# EAGLE board fiducialandalignment (EAGLE 8.6.0)

Size 6.35 x 95.25 mm. Coordinates in mm from the lower left corner, seen from the top.
Outline: 0,0 6.35,0 6.35,95.25 0,95.25 0,0
Copper layers (1*16): Top 0.035mm / dielectric 1.5mm / Bottom 0.035mm
Design rules "default": minimum track width 6mil, minimum drill 0.35mm, track to track 6mil, track to pad 6mil, pad to pad 6mil, via to via 6mil, smd to smd 6mil, copper to edge 40mil, drill to drill 6mil, minimum pad ring 10mil, minimum via ring 8mil, stop-mask expansion 4mil, vias tented up to drill 0mil, thermal gap 10mil
Holes 3.17 mm at 3.17,3.17

## Footprints (pad centres in the part's own frame; a part is rotated, then mirrored left to right if it is on the bottom)
FIDUCIAL-MICRO = smd 0.635 x 0.635: 1 0,0

## Placement (x,y rotation side)
E$1  [FIDUCIAL-MICRO]  3.17,9.53 0 top

## Library data of the parts
E$1 = SparkFun-Aesthetics